# EAGLE board Simon_yz87 (EAGLE 8.6.0)
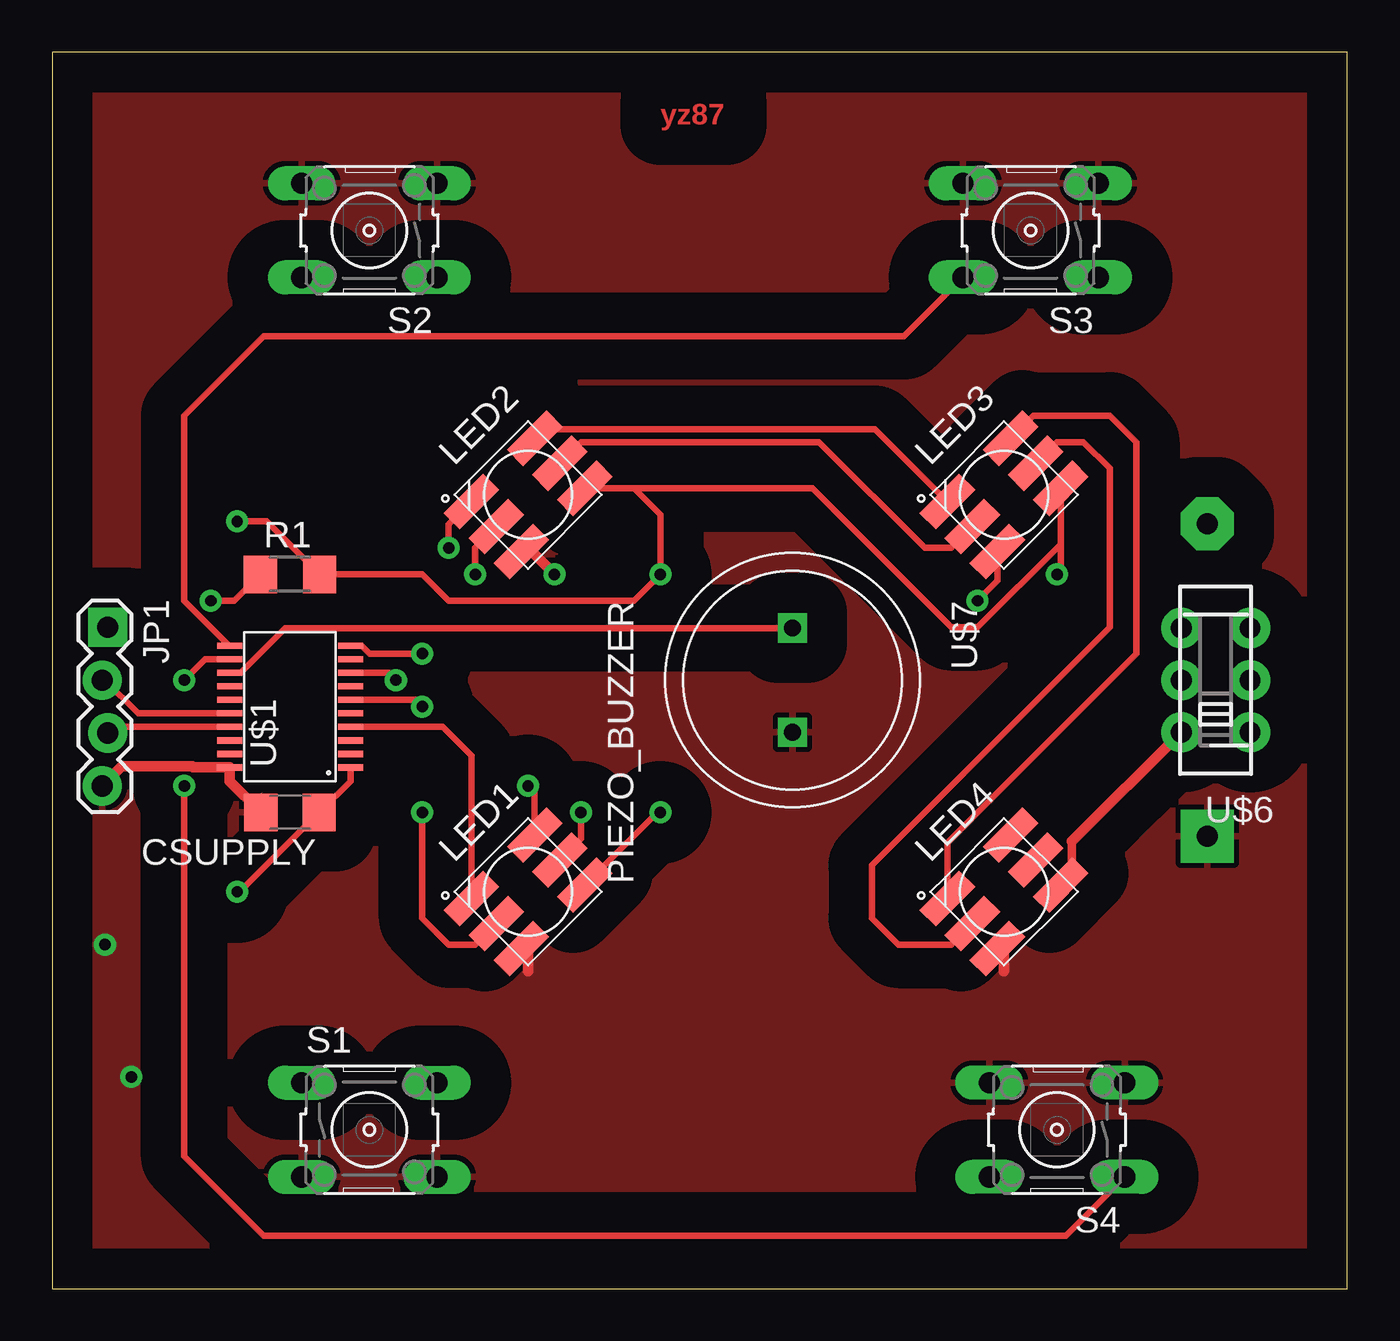
[diagram p0: board, top side]
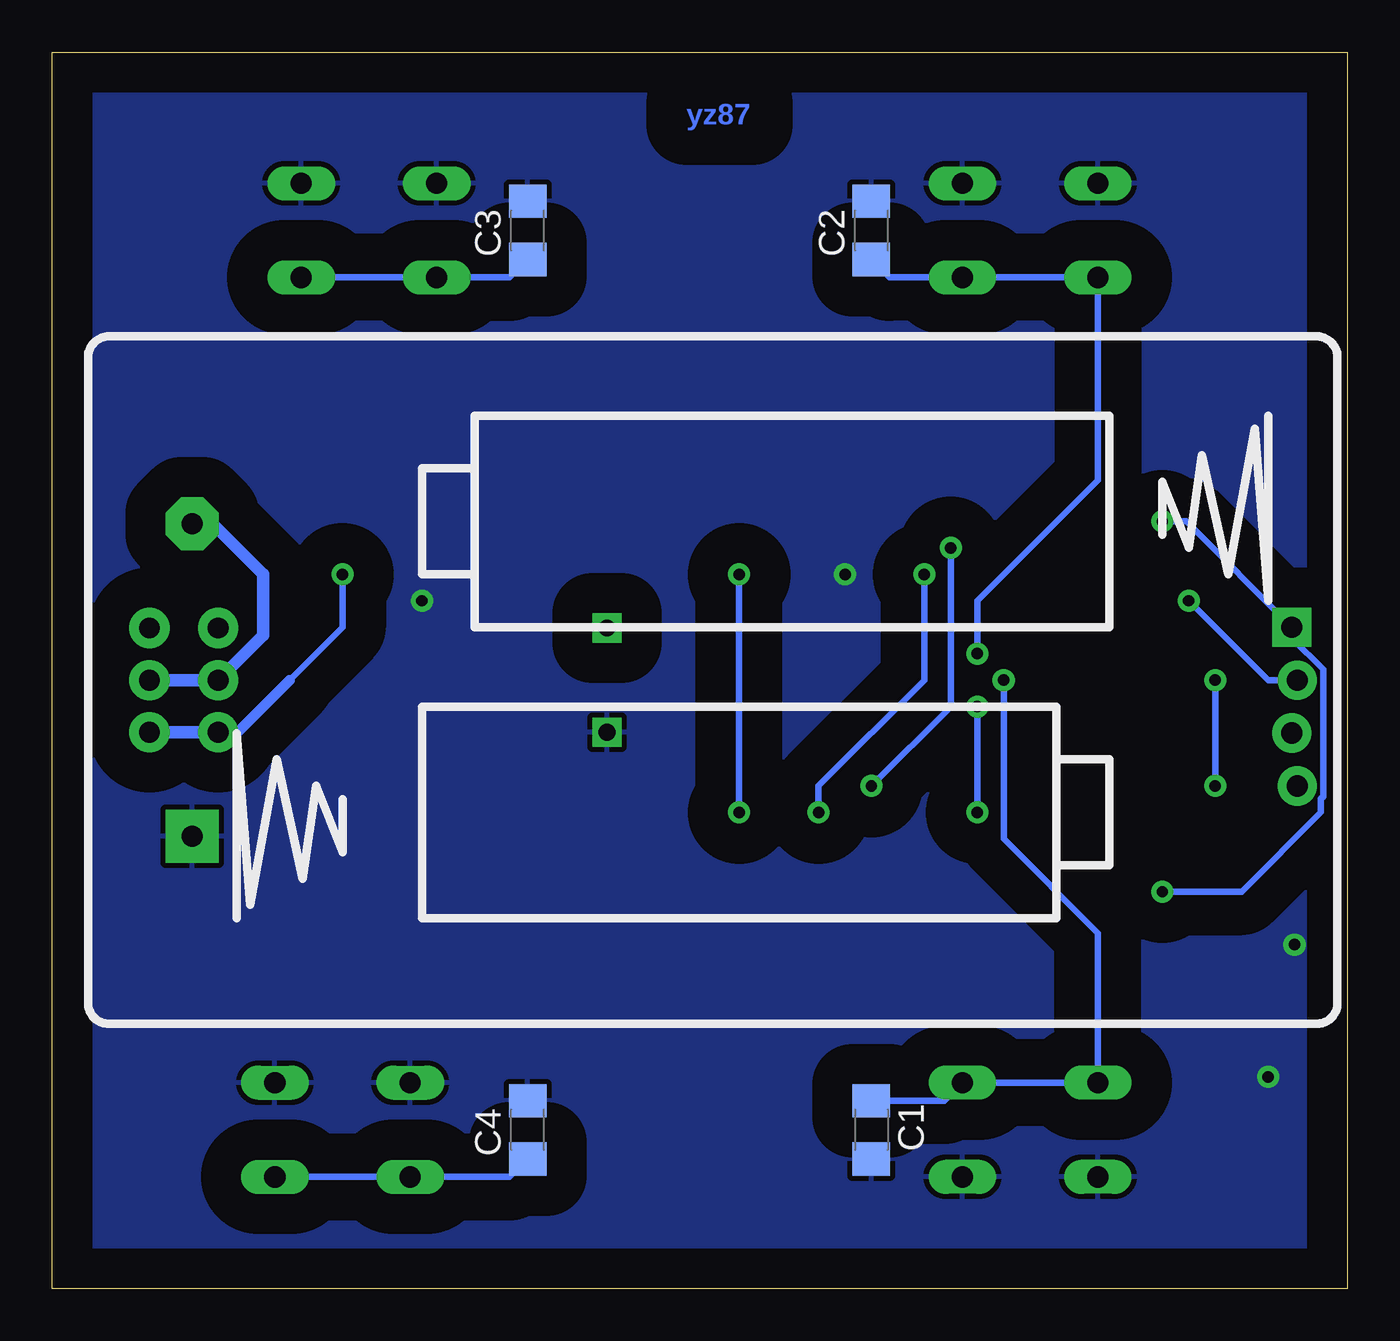
[diagram p1: board, bottom side, seen from below]

Size 62.21 x 59.36 mm. Coordinates in mm from the lower left corner, seen from the top.
Outline: 0,0 62.21,0 62.21,59.36 0,59.36 0,0
Copper layers (1*16): Top 0.035mm / dielectric 1.5mm / Bottom 0.035mm
Design rules "AdvancedCircuitsBarebones": minimum track width 6mil, minimum drill 20mil, track to track 6mil, track to pad 6mil, pad to pad 6mil, via to via 6mil, smd to smd 6mil, copper to edge 10mil, drill to drill 6mil, minimum pad ring 12mil, minimum via ring 10mil, stop-mask expansion 4mil, vias tented up to drill 25mil, thermal gap 10mil

## Footprints (pad centres in the part's own frame; a part is rotated, then mirrored left to right if it is on the bottom)
BATTERY_PACK_2AA = drill 1 pad 2.54 octagon: 3V 7.5,25 | drill 1 pad 2.54 square: GND -7.5,25
C1206 = smd 1.6 x 1.8: 1 -1.4,0; 2 1.4,0
1X04_LOCK = drill 1.016 pad 1.88 square: 1 0,0.127 | drill 1.016 pad 1.88: 2 2.54,-0.127; 3 5.08,0.127; 4 7.62,-0.127
5050 = smd 2.68 x 1.1: 1 -2.15,1.7; 2 -2.15,0; 3 -2.15,-1.7; 4 2.15,-1.7; 5 2.15,0; 6 2.15,1.7
R1206 = smd 1.6 x 1.803: 1 -1.422,0; 2 1.422,0
B3F-10XX = drill 1.016 long: 1 -3.251,2.261; 2 3.251,2.261; 3 -3.251,-2.261; 4 3.251,-2.261
PW20 = smd 0.3 x 1.2: 1 -2.925,-2.9; 2 -2.275,-2.9; 3 -1.625,-2.9; 4 -0.975,-2.9; 5 -0.325,-2.9; 6 0.325,-2.9; 7 0.975,-2.9; 8 1.625,-2.9; 9 2.275,-2.9; 10 2.925,-2.9; 11 2.925,2.9; 12 2.275,2.9; 13 1.625,2.9; 14 0.975,2.9; 15 0.325,2.9; 16 -0.325,2.9; 17 -0.975,2.9; 18 -1.625,2.9; 19 -2.275,2.9; 20 -2.925,2.9
JS_DPDT_TH = drill 1 pad 1.93: 1 -2.5,-1.65; 2 0,-1.65; 3 2.5,-1.65; 4 -2.5,1.65; 5 0,1.65; 6 2.5,1.65
PIEZO_BUZZER = drill 0.8 square: P$1 -2.5,0; P$2 2.5,0

## Placement (x,y rotation side)
BAT1  [BATTERY_PACK_2AA]  30.48,29.21 90 bottom
C1  [C1206]  22.86,7.62 270 bottom
C2  [C1206]  22.86,50.8 90 bottom
C3  [C1206]  39.37,50.8 90 bottom
C4  [C1206]  39.37,7.62 90 bottom
CSUPPLY  [C1206]  11.43,22.86 180 top
JP1  [1X04_LOCK]  2.54,31.75 270 top
LED1  APA102  [5050]  22.86,19.05 45 top
LED2  APA102  [5050]  22.86,38.1 45 top
LED3  APA102  [5050]  45.72,38.1 45 top
LED4  APA102  [5050]  45.72,19.05 45 top
R1  [R1206]  11.43,34.29 0 top
S1  [B3F-10XX]  15.24,7.62 0 top
S2  [B3F-10XX]  15.24,50.8 180 top
S3  [B3F-10XX]  46.99,50.8 180 top
S4  [B3F-10XX]  48.26,7.62 180 top
U$1  MSP430G2XX3TSSOP  [PW20]  11.43,27.94 90 top
U$6  SWITCH_DPDT  [JS_DPDT_TH]  55.88,29.21 90 top
U$7  PIEZO_BUZZER  [PIEZO_BUZZER]  35.56,29.21 270 top

## Library data of the parts
BAT1 LED1-LED4 U$1 U$6 U$7 = ELEC327
C1-C4 CSUPPLY = rcl
JP1 = SparkFun
R1 = resistor
S1-S4 = switch-omron; MPN: B3F-1000; OC_FARNELL: 176432; OC_NEWARK: 36M3542

## Nets
BAT_VCC: BAT1.3V U$6.2 U$6.5
GND: BAT1.GND C1.2 C2.2 C3.2 C4.2 CSUPPLY.2 JP1.4 LED1.3 LED2.3 LED3.3 LED4.3 S1.3 S1.4 S2.3 S2.4 S3.3 S3.4 S4.3 S4.4 U$1.20 U$7.P$2
N$1: LED1.6 LED2.1
N$2: LED1.5 LED2.2
N$3: LED2.6 LED3.1
N$4: LED2.5 LED3.2
N$5: LED3.6 LED4.1
N$6: LED3.5 LED4.2
N$7: LED1.1 U$1.4
N$8: LED1.2 U$1.6
N$11: U$1.13 U$7.P$1
N$13: C1.1 S1.1 S1.2 U$1.8
N$14: C2.1 S2.1 S2.2 U$1.10
N$15: C3.1 S3.1 S3.2 U$1.11
N$16: C4.1 S4.1 S4.2 U$1.12
RST: JP1.2 R1.1 U$1.16
TEST: JP1.3 U$1.17
VCC: CSUPPLY.1 JP1.1 LED1.4 LED2.4 LED3.4 LED4.4 R1.2 U$1.1 U$6.1 U$6.4

## Tracks (layer width: path | path; a pad name or v marks a point on that pad's centre or on a via)
BAT_VCC
  Bottom 0.61: U$6.2 U$6.5 52.07,31.37 52.07,34.29 54.49,36.71 BAT1.3V
GND  (via drill 0.55)
  Top 0.305: LED3.3 45.4,33.97 v44.45,33.02
  Top 0.508: LED4.3 45.72,16.33 45.72,15.24 | LED1.3 22.86,16.33 22.86,15.24 | CSUPPLY.2 8.53,24.36 U$1.20 6.79,25.02 6.74,25.07 3.35,25.07 JP1.4 | LED2.3 23.04,35.38 v24.13,34.29
  other vias: 2.54,16.51 3.81,10.16
  pour Top (isolate 1.93): 0,0 0,59.69 62.23,59.69 62.23,0
  pour Bottom (isolate 1.93): 0,0 0,59.69 62.23,59.69 62.23,0
N$1  (via drill 0.55)
  Top 0.305: LED1.6 23.18,23.81 v22.86,24.13 | v19.05,35.56 19.05,36.69 LED2.1
  Bottom 0.305: v22.86,24.13 19.05,27.94 19.05,33.02 v19.05,35.56
N$2  (via drill 0.55)
  Top 0.305: LED1.5 25.4,21.59 v25.4,22.86 | v20.32,34.29 20.32,35.56 LED2.2
  Bottom 0.305: v25.4,22.86 25.4,24.13 20.32,29.21 v20.32,34.29
N$3
  Top 0.305: LED3.1 39.52,41.26 23.62,41.26 LED2.6
N$4
  Top 0.305: LED2.5 25.4,40.64 36.83,40.64 41.91,35.56 43.18,35.56 LED3.2
N$5
  Top 0.305: LED3.6 47.13,41.91 50.8,41.91 52.07,40.64 52.07,30.48 43,21.41 LED4.1
N$6
  Top 0.305: LED3.5 48.26,40.64 49.53,40.64 50.8,39.37 50.8,31.75 39.37,20.32 39.37,17.78 40.64,16.51 43.18,16.51 LED4.2
N$7
  Top 0.305: LED1.1 20.14,25.58 18.75,26.96 U$1.4
N$8  (via drill 0.55)
  Top 0.305: LED1.2 20.32,16.51 19.05,16.51 17.78,17.78 v17.78,22.86 | v17.78,27.94 17.45,28.27 U$1.6
  Bottom 0.305: v17.78,22.86 v17.78,27.94
N$11
  Top 0.305: U$7.P$1 11.21,31.71 9.06,29.57 U$1.13
N$13  (via drill 0.55)
  Top 0.305: v16.51,29.21 16.16,29.57 U$1.8
  Bottom 0.305: C1.1 19.35,9.02 S1.2 S1.1 11.99,17.07 16.51,21.59 v16.51,29.21
N$14  (via drill 0.55)
  Top 0.305: v17.78,30.48 15.25,30.48 14.86,30.86 U$1.10
  Bottom 0.305: C2.1 22,48.54 S2.1 S2.2 11.99,38.81 17.78,33.02 v17.78,30.48
N$15
  Top 0.305: S3.2 40.92,45.72 10.16,45.72 6.35,41.91 6.35,33.02 8.51,30.86 U$1.11
  Bottom 0.305: S3.1 S3.2 40.23,48.54 C3.1
N$16  (via drill 0.55)
  Top 0.305: S4.1 48.69,2.54 10.16,2.54 6.35,6.35 v6.35,24.13 | v6.35,29.21 7.36,30.21 U$1.12
  Bottom 0.305: S4.1 S4.2 40.23,5.36 C4.1 | v6.35,24.13 v6.35,29.21
RST  (via drill 0.55)
  Top 0.305: JP1.2 2.54,29.21 4.13,27.61 U$1.16 | v7.62,33.02 8.74,33.02 R1.1
  Bottom 0.305: v7.62,33.02 3.81,29.21 JP1.2
TEST
  Top 0.305: JP1.3 2.96,26.96 U$1.17
VCC  (via drill 0.55)
  Top 0.305: LED2.4 27.94,38.42 | 27.94,38.42 36.51,38.42 43.18,31.75 44.45,31.75 48.44,35.74 LED3.4 48.44,34.47 v48.26,34.29 | U$1.1 14.33,24.36 CSUPPLY.1 9.02,19.05 v8.89,19.05 | v8.89,36.83 10.31,36.83 R1.2 17.78,34.29 19.05,33.02 27.94,33.02 v29.21,34.29 29.21,37.15 27.94,38.42 | LED1.4 29.07,22.86 v29.21,22.86
  Top 0.406: 48.98,21.46 48.98,19.91 LED4.4
  Top 0.508: U$6.4 48.98,21.46
  Bottom 0.305: v48.26,34.29 48.26,31.75 50.8,29.21 | v8.89,36.83 7.75,36.83 JP1.1 2.67,31.22 1.17,29.73 1.17,23.61 1.27,23.51 1.27,22.86 5.08,19.05 v8.89,19.05 | v29.21,22.86 v29.21,34.29
  Bottom 0.508: U$6.4 53.3,26.71 50.8,29.21
  Bottom 0.61: U$6.4 U$6.1

## Text on the board
Top: yz87
Bottom: yz87